# Allegro board PROIECT_CEF2_AAF.brd
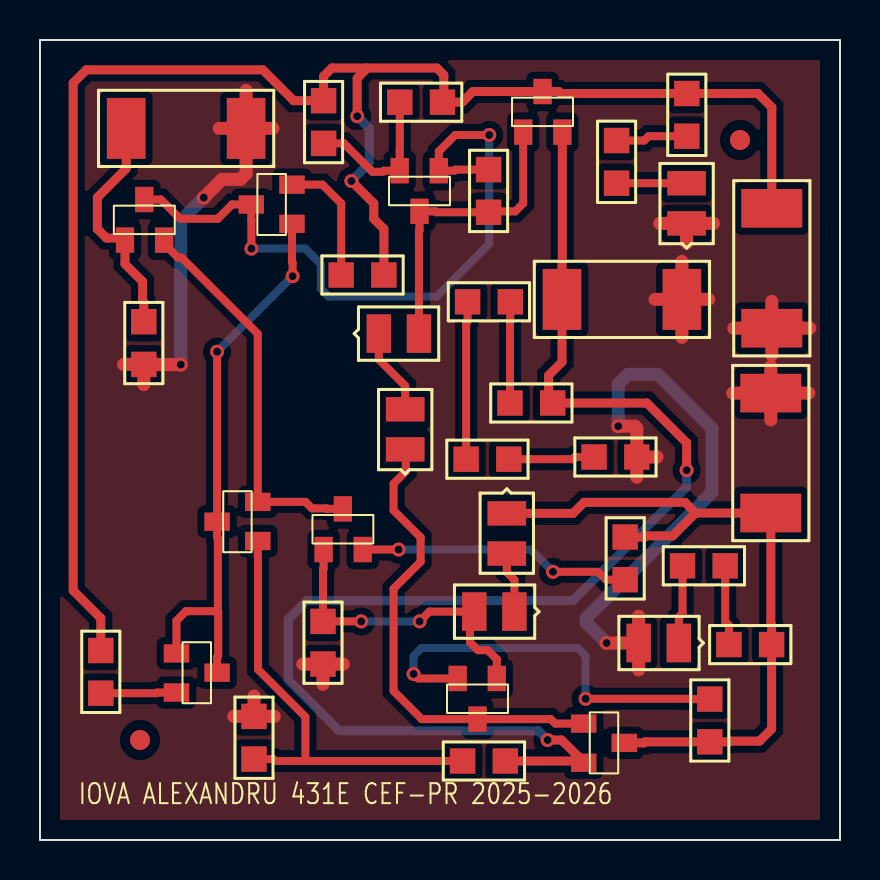
[diagram p0: board, top side]
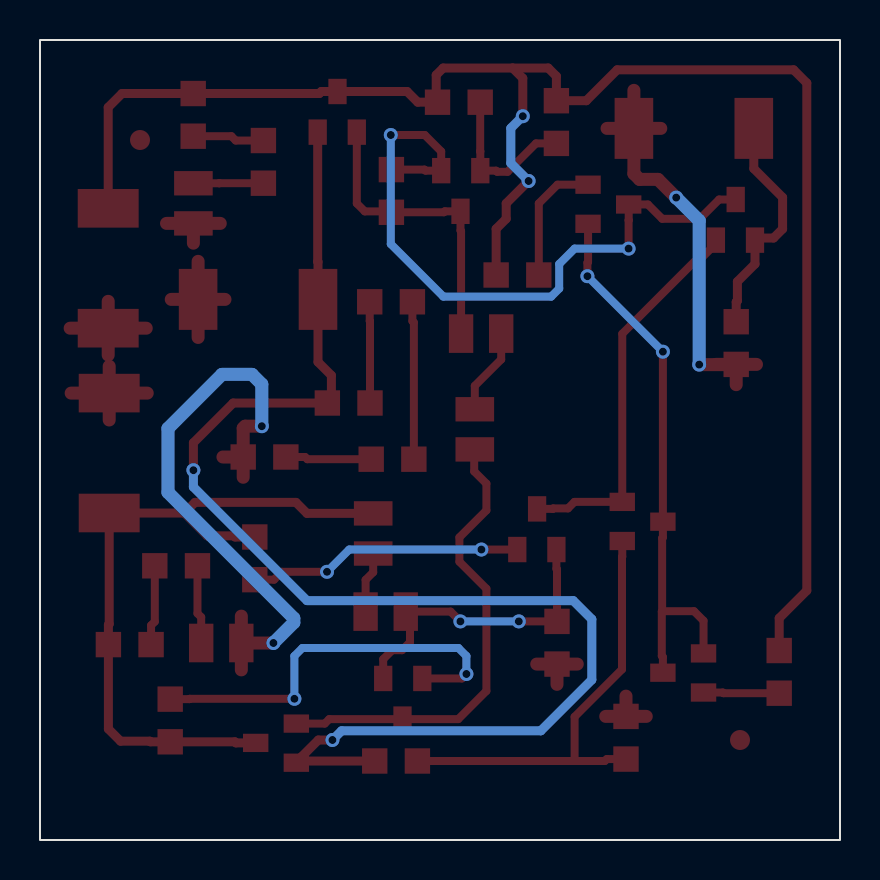
[diagram p1: board, bottom side, seen from below]

Outline 40 x 40 mm; copper layers: TOP, BOTTOM. Coordinates in mm from the lower left corner of the outline.
Outline path: rectangle 0,0 40,40

## Design rules (mm)
nets with their own width: min track width 0.4; nets N66482 N66488 N66606 N66616 N66648 N66814 N66990 N67038 N67056 N67316 N67354 N67488 N67504 N67935 N663861 N664601 N669241 N670721 N672161 N675241 N675521
nets with their own width: min track width 0.45; nets N66336 N66858 VIN VOUT
nets with their own width: min track width 0.65; nets GND

## Placement (name value [footprint] x y rotation side)
C1  470p  [SMC0805]  22.43 33.52 270 top
C2  1u  [SMC0805]  14.18 34.83 90 top
D1  5V,LED,LED  [SMD080512]  32.33 30.83 90 top
D2  5V,LED,LED  [SMD080512]  31.94 9.85 180 top
J1  CON2  [SMR2512]  26.1 27.03 0 top
J2  CON2  [SMR2512]  36.59 25.59 90 top
J3  CON2  [SMR2512]  36.54 16.35 90 top
J4  CON2  [SMR2512]  4.31 35.58 0 top
NOREF  -  [unnamed]  35 35 0 top
NOREF#2  -  [unnamed]  5 5 0 top
Q1  QBC846B  [TO236]  4.25 30.12 270 top
Q2  QBC846B  [TO236]  10.76 14.95 0 top
Q3  QBC856B  [TO236]  12.47 30.81 0 top
Q4  QBC856B  [TO236]  6.95 9.33 180 top
Q5  QBC846B  [TO236]  14.18 14.65 270 top
Q6  QBC846B  [TO236]  22.84 7.95 90 top
Q7  QBC856B  [TO236]  19.94 33.34 90 top
Q8  QBC846B  [TO236]  24.16 35.52 270 top
Q9  QBC856B  [TO236]  27.31 5.82 180 top
R1  220k  [SMR0805]  5.19 23.78 90 top
R2  220  [SMR0805]  15.06 28.25 0 top
R3  220  [SMR0805]  3.04 7.34 90 top
R4  470  [SMR0805]  29.26 15.15 270 top
R5  2.2k  [SMR0805]  14.15 10.93 270 top
R6  330  [SMR0805]  33.49 4.91 90 top
R7  330  [SMR0805]  17.99 36.89 0 top
R8  8.2k  [SMR0805]  21.13 3.95 0 top
R9  910  [SMR0805]  10.7 6.18 270 top
R10  22  [SMR0805]  23.5 21.85 0 top
R11  22  [SMR0805]  21.38 26.91 0 top
R12  22  [SMR0805]  23.44 19.04 180 top
R13  10  [SMR0805]  29.84 19.15 180 top
R14  150  [SMR0805]  32.34 35.19 90 top
R15  150  [SMR0805]  36.58 9.77 180 top
R16  82  [SMR0805]  28.83 32.84 90 top
R17  82  [SMR0805]  34.26 13.71 180 top
U1  1N4148  [SMD080512]  23.72 11.42 180 top
U2  1N4148  [SMD080512]  23.34 16.33 270 top
U3  1N4148  [SMD080512]  16.94 25.32 0 top
U4  1N4148  [SMD080512]  18.26 19.53 90 top

## Library data of the parts
C1 C2 = C
D1 D2 = LED_0
J1-J4 = CON2
Q1 Q2 Q5 Q6 Q8 = QBC846B_1
Q3 Q4 Q7 Q9 = QBC856B_1
R1-R17 = R
U1-U4 = 1N4148_0

## Footprints (pads in the part's own frame, mm; a bottom-side part is the same pattern mirrored in y, then rotated)
SMC0805
  rect 1.27x1.27 smd: 1(0,0) 2(2.134,0)
SMD080512
  rect 1.219x1.93 smd: 1(0,0) 2(2.007,0)
SMR0805
  rect 1.27x1.27 smd: 1(0,0) 2(2.134,0)
SMR2512
  rect 1.93x3.048 smd: 1(0,0) 2(5.994,0)
TO236
  rect 1.27x0.914 smd: 1(0.127,0) 2(0.127,1.956) 3(-1.905,0.965)
unnamed
  round 1 smd: (0,0)

## Nets
GND: D1.1(2) D2.2 J1.2 J2.1 J3.2 J4.2 R1.1 R5.2 R9.1 R13.1
VIN: J4.1 Q1.1 R1.2
VOUT: J1.1 Q8.2(E) Q9.2(E) R8.2 R10.2
N66336: C2.2 J2.2 Q8.3 R2.2 R3.2 R7.2 R14.2
N66482: Q3.2(E) R2.1
N66488: Q4.2(E) R3.1
N66606: C2.1 Q7.2(E) R7.1
N66616: Q2.3 Q3.1 Q4.1 Q4.3
N66648: C1.1 Q1.3 Q3.3 Q7.1
N66814: C1.2 Q7.3 Q8.1 U3.2
N66858: J3.1 Q9.3 R4.1 R6.1 R15.1 U2.1(2)
N66990: U3.1(2) U4.2
N67038: Q2.1 R8.1 R9.2
N67056: Q1.2(E) Q2.2(E) Q5.3
N67316: Q6.3 Q9.1 U4.1(2)
N67354: Q5.1 Q6.1 R5.1 U1.2
N67488: Q5.2(E) R4.2
N67504: Q6.2(E) R6.2
N67935: D2.1(2) R17.2
N663861: R14.1 R16.2
N664601: D1.2 R16.1
N669241: R10.1 R11.2
N670721: R11.1 R12.2
N672161: R12.1 R13.2
N675241: U1.1(2) U2.2
N675521: R15.2 R17.1

## Via types
v1: diameter 0.7, hole 0.4, TOP to BOTTOM, 18 vias

## Routing (per net, layer and track width the routed paths; a pad name or vN(x,y) marks a point on that pad's centre or on a via; arc(x,y) is an arc through that point)
GND: length 83
  TOP w0.65: 34.69,25.59 J2.1 ; J2.1 38.49,25.59 ; J2.1 36.59,26.93 ; J2.1 36.59,24.25 ; R1.1 5.2,23.77 v1(7.04,23.77) ; R1.1 6.2,23.78 ; R1.1 5.19,22.77 ; R1.1 4.18,23.78 ; D2.2 29.93,11.19 ; D2.2 29.93,8.51 ; D2.2 v1(28.33,9.85) ; 30.99,30.83 D1.1 ; D1.1 33.67,30.83 ; D1.1 32.33,29.84 ; R13.1 29.84,20.59 29.74,20.69 v1(28.91,20.69) ; R13.1 30.85,19.15 ; R13.1 29.84,18.14 ; 13.14,8.8 R5.2 ; R5.2 14.15,7.78 ; R5.2 15.16,8.8 ; J1.2 33.44,27.03 ; J1.2 30.75,27.03 ; J1.2 32.09,28.93 ; J1.2 32.09,25.13 ; R9.1 11.71,6.18 ; R9.1 9.69,6.18 ; R9.1 10.7,7.19 ; 34.64,22.34 J3.2 ; J3.2 38.44,22.34 ; J3.2 36.54,23.69 ; J3.2 36.54,21 ; J4.2 11.65,35.58 ; J4.2 10.3,33.31 10.02,33.03 9.1,33.03 v1(8.19,32.12) ; J4.2 8.96,35.58 ; J4.2 10.3,37.48
  BOTTOM w0.65: v1(28.91,20.69) 28.91,22.79 29.4,23.28 30.9,23.28 33.6,20.58 33.6,17.38 27.31,11.09 27.31,10.87 v1(28.33,9.85) ; v1(7.04,23.77) 7.04,30.97 v1(8.19,32.12)
VIN: length 11.7
  TOP w0.45: J4.1 4.31,33.57 2.87,32.13 2.87,30.55 3.32,30.1 4.14,30.1 4.25,29.99 4.25,28.8 5.13,27.92 5.13,26.96 5.19,26.9 R1.2
VOUT: length 69.6
  TOP w0.45: Q8.2 26.12,28.92 26.1,28.91 J1.1 26.1,23.9 25.43,23.23 25.43,22.05 R10.2 30.34,21.85 32.33,19.86 v1(32.33,18.49) ; 26.92,3.95 26.92,4.16 26.08,5 v1(25.38,5) ; 26.92,3.95 27.01,3.86 Q9.2 ; 26.92,3.95 R8.2
  BOTTOM w0.45: v1(25.38,5) 24.92,5.46 14.96,5.46 12.41,8.01 12.41,11.04 13.34,11.97 26.65,11.97 32.33,17.65 v1(32.33,18.49)
N66336: length 85.2
  TOP w0.45: 16.37,38.6 15.86,38.09 v1(15.86,36.19) ; 16.37,38.6 14.59,38.6 14.18,38.19 C2.2 12.69,36.96 11.14,38.51 2.32,38.51 1.66,37.85 1.66,12.47 3.04,11.09 R3.2 ; 16.37,38.6 19.84,38.6 20.19,38.25 20.19,36.96 R7.2 21.11,36.89 21.65,37.42 25.93,37.42 26.04,37.32 R14.2 35.9,37.32 36.59,36.63 J2.2 ; R2.2 17.19,30.56 16.69,31.06 16.69,31.83 v1(15.57,32.95)
  BOTTOM w0.45: v1(15.57,32.95) 16.46,33.84 16.46,35.59 v1(15.86,36.19)
N66482: length 6.4
  TOP w0.4: 12.6,32.77 14.12,32.77 15.06,31.83 R2.1
N66488: length 3.8
  TOP w0.4: Q4.2 5.86,7.37 5.83,7.34 R3.1
N66606: length 7.8
  TOP w0.4: C2.1 15.2,34.83 16.62,33.41 17.14,33.41 17.2,33.47 Q7.2 17.98,34.43 17.99,34.43 R7.1
N66616: length 28
  TOP w0.4: 12.6,30.81 12.6,28.9 12.63,28.87 v1(12.63,28.19) ; Q4.3 8.86,9.15 8.91,9.2 8.91,11.42 8.89,11.44 ; v1(8.86,24.41) Q2.3 8.86,15.13 8.89,15.09 8.89,11.44 ; Q4.1 6.82,10.96 7.3,11.44 8.89,11.44
  BOTTOM w0.4: v1(8.86,24.41) v1(12.63,28.19)
N66648: length 34.7
  TOP w0.4: Q1.3 6.04,32.02 7.01,31.06 8.89,31.06 9.6,31.78 10.56,31.78 10.56,30.99 10.57,30.99 v1(10.57,29.57) ; C1.1 20.78,33.52 20.72,33.47 Q7.1 19.94,34.43 20.76,35.25 v1(22.46,35.25)
  BOTTOM w0.4: v1(10.57,29.57) 13.27,29.57 14.04,28.8 14.04,27.57 14.44,27.17 19.83,27.17 22.46,29.8 v1(22.46,35.25)
N66814: length 15.1
  TOP w0.4: U3.2 18.95,30.44 18.97,30.47 Q7.3 19.76,31.43 19.81,31.39 C1.2 22.47,31.43 23.76,31.43 24.16,31.83 Q8.1
N66858: length 36.1
  TOP w0.45: 32.78,16.35 J3.1 36.54,10.8 36.58,10.76 R15.1 36.58,5.55 35.97,4.94 34.51,4.94 34.48,4.91 R6.1 30.26,4.91 30.2,4.85 Q9.3 ; 32.78,16.35 31.64,15.21 30.31,15.21 30.25,15.15 R4.1 ; 32.78,16.35 32.25,16.88 27.2,16.88 26.65,16.33 U2.1
N66990: length 4.3
  TOP w0.4: U4.2 18.26,22.71 16.94,24.03 U3.1
N67038: length 22.5
  TOP w0.4: 13.27,3.95 13.27,6.16 10.9,8.53 10.9,14.15 10.89,14.17 Q2.1 ; 13.27,3.95 11.76,3.95 11.66,4.05 R9.2 ; 13.27,3.95 R8.1
N67056: length 19.5
  TOP w0.4: Q5.3 14.36,16.55 14.34,16.58 13.6,16.58 13.27,16.91 Q2.2 10.89,25.31 7.07,29.13 6.89,29.13 6.21,29.82 6.21,29.99
N67316: length 23.6
  TOP w0.4: U4.1 18.29,19.5 18.29,18.43 17.68,17.82 17.68,16.48 19.03,15.13 19.03,13.92 17.68,12.57 17.68,7.45 19.09,6.04 Q6.3 25.54,6.04 25.76,5.82 Q9.1
N67354: length 15.6
  TOP w0.4: v1(18.98,10.93) 19.47,11.42 U1.2 21.5,11.21 21.5,9.89 21.9,9.49 22.39,9.49 22.84,9.04 Q6.1 ; Q5.1 14.18,13.56 14.15,13.53 R5.1 v1(16.06,10.93)
  BOTTOM w0.4: v1(16.06,10.93) v1(18.98,10.93)
N67488: length 13.7
  TOP w0.4: v1(25.65,13.41) 27.9,13.41 28.3,13.02 R4.2 ; Q5.2 v1(17.93,14.52)
  BOTTOM w0.4: v1(17.93,14.52) 24.54,14.52 v1(25.65,13.41)
N67504: length 20.5
  TOP w0.4: v1(27.28,7.06) 32.51,7.06 32.53,7.04 R6.2 ; v1(18.68,8.3) 18.9,8.08 Q6.2
  BOTTOM w0.4: v1(27.28,7.06) 27.28,9.2 26.88,9.6 19.08,9.6 18.68,9.2 v1(18.68,8.3)
N67935: length 3.9
  TOP w0.4: D2.1 31.94,11.14 32.13,11.33 R17.2
N663861: length 3.6
  TOP w0.4: R16.2 30.21,34.97 30.43,35.19 R14.1
N664601: length 3.5
  TOP w0.4: D1.2 31.04,32.84 31.03,32.84 R16.1
N669241: length 5.1
  TOP w0.4: R11.2 23.51,25.95 23.5,25.93 R10.1
N670721: length 7.9
  TOP w0.4: R11.1 21.38,25.95 21.31,25.87 R12.2
N672161: length 4.3
  TOP w0.4: R12.1 26.63,19.04 26.74,19.15 R13.2
N675241: length 3.1
  TOP w0.4: U2.2 23.34,13.39 23.72,13.01 U1.1
N675521: length 4
  TOP w0.4: R15.2 34.45,10.73 34.26,10.92 R17.1

## Copper pours and planes (outline as drawn; the poured copper is in the pictures)
GND on TOP: 1,1 1,39 39,39 39,1 ; 10 cut-outs

## Text on the board
Ref Des/Silkscreen Top: IOVA ALEXANDRU 431E CEF-PR 2025-2026
XSECTION_CHART: *  SURFACE - AIR 0 MM | L1 TOP CONDUCTOR - COPPER 0.018 MM | *  DIELECTRIC - FR-4 1.564 MM | L2 BOTTOM CONDUCTOR - COPPER 0.018 MM | DESIGN CROSS SECTION CHART | ___________________________ | TOTAL THICKNESS 1.6 MM | 1-2
NCLEGEND-1-2: FIGURE | FINISHED_SIZE | 0.4 | DRILL CHART: TOP to BOTTOM | ALL UNITS ARE IN MILLIMETERS | PLATED | QTY | 18
